# Altium PCB PCB_DUVBot_v0.00.PcbDoc (part 1 of 2)
Units mm, origin at the board's own origin, x right, y up, seen from the top; angles counter-clockwise.
Board outline 279.5 x 67.5 mm, 2 copper layers (Top Layer, Bottom Layer), stack 1.671 mm thick; 224 components, 141 nets, 694 pads, 218 vias.
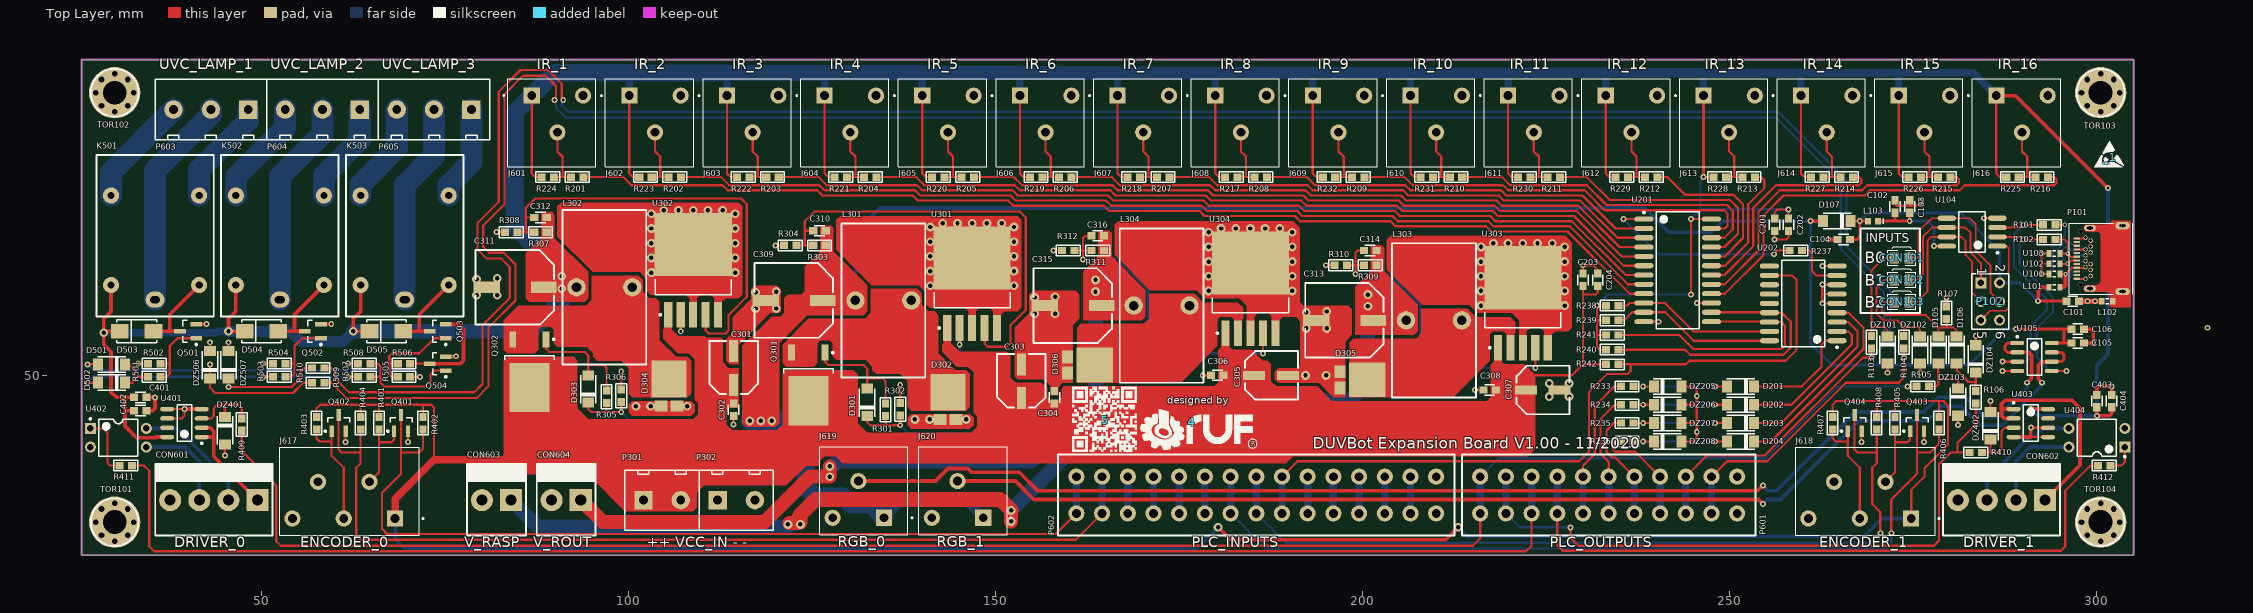
[diagram p0: Top Layer view]
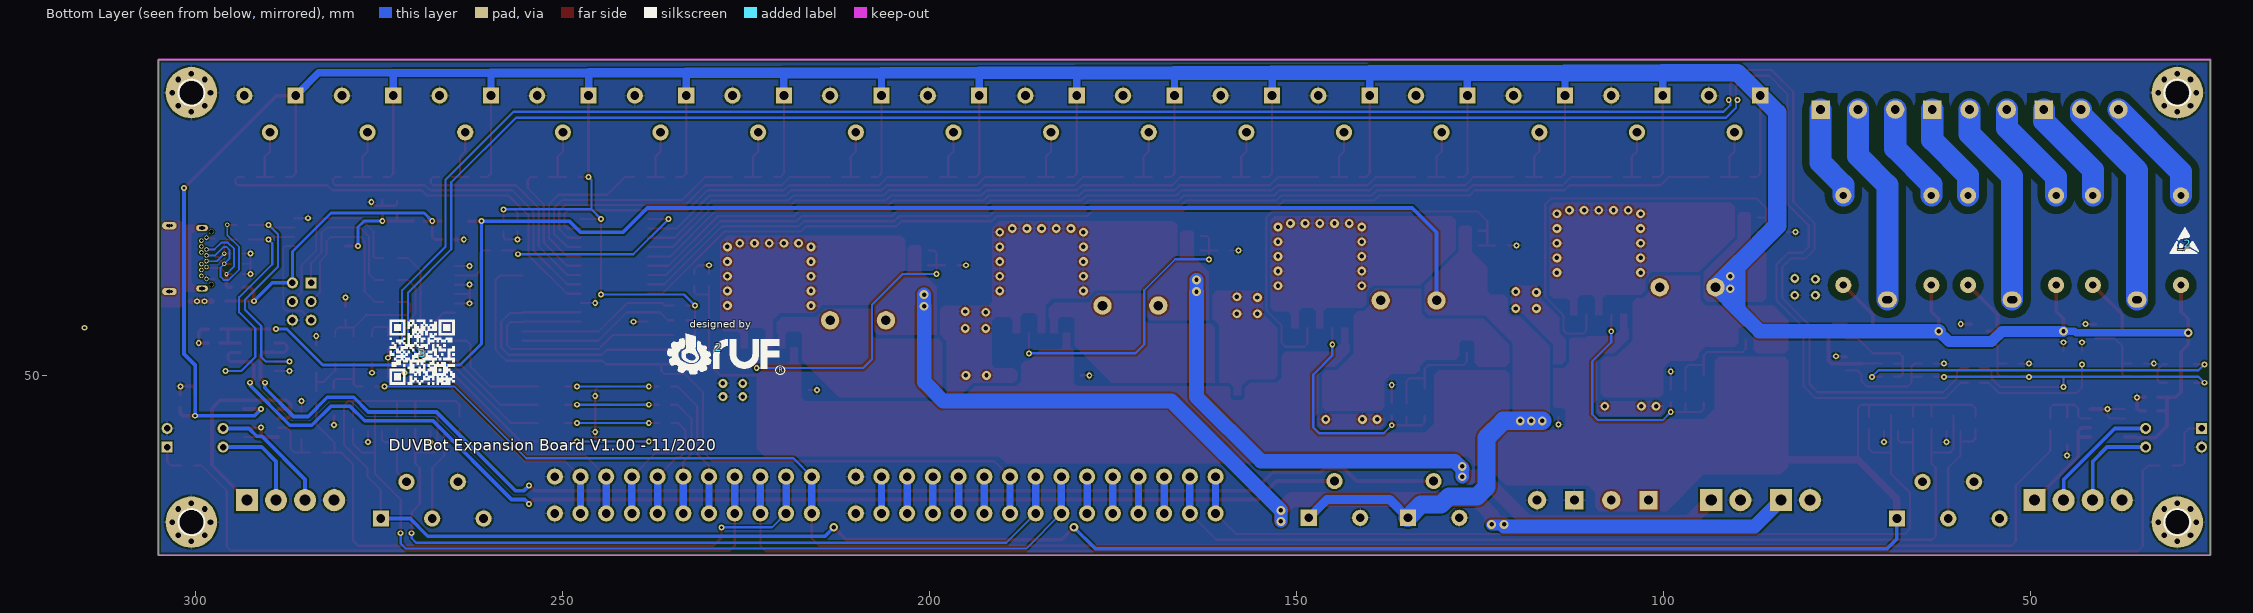
[diagram p1: Bottom Layer view, seen from below]
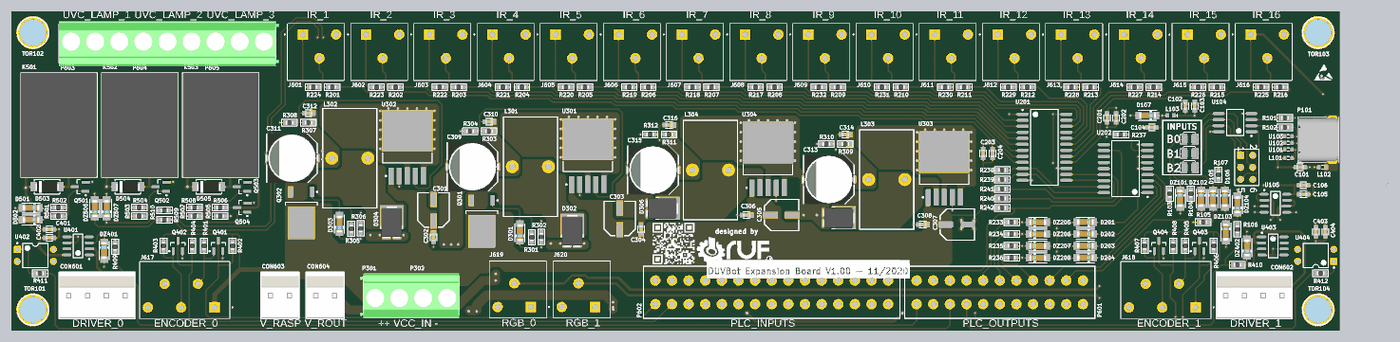
[diagram p3: 3D render of the assembled board from above, using the file's embedded part models]

## Layer stack, top to bottom
Top Layer: signal copper 0.0356
Dielectric: core 1.6, FR-4, Dk 4.8
Bottom Layer: signal copper 0.0356

## Board outline
305,93 25.5,93 25.5,25.5 305,25.5 305,93

## Design rules (kind name [scope] priority, off if disabled: settings)
Clearance Clearance_PowerAC [WithinRoom('Room_PowerAC')] p1: gap=1
Clearance Clearance_USB [WithinRoom('Room_USB')] p2: gap=0.2
Clearance [All] p3: gap=0.254
ComponentClearance [All] p1: gap=0 collisioncheckmode=3 verticalgap=0 showdistances=FALSE
PlaneClearance PlaneClearance_USB [WithinRoom('Room_USB')] p1: clearance=0.4
PlaneClearance PlaneClearance_PowerAC [WithinRoom('Room_PowerAC')] p2: clearance=1.5
PlaneClearance [All] p3: clearance=0.508
PlaneConnect PlaneConnect_PowerAC [WithinRoom('Room_PowerAC')] p1: planeconnectstyle=Relief reliefexpansion=0.508 reliefentries=4 reliefconductorwidth=0.5 reliefairgap=0.5
PlaneConnect PlaneConnect_USB [WithinRoom('Room_USB')] p2: planeconnectstyle=Relief reliefexpansion=0.2 reliefentries=4 reliefconductorwidth=0.254 reliefairgap=0.2
PlaneConnect [All] p3: planeconnectstyle=Relief reliefexpansion=0.508 reliefentries=4 reliefconductorwidth=0.254 reliefairgap=0.254
PolygonConnect [All] p1: connectstyle=Relief reliefconductorwidth=0.254 reliefentries=4 polygonreliefangle="90 Angle"
RoomDefinition Room_USB [InComponentClass('Components Class 3')] p1: confinementstyle=ConfineIn formatcopy=TRUE lockcomponents=FALSE outline 289.3,74.2 305.969,74.2 305.969,57.6 289.3,57.6
RoomDefinition Room_PowerAC [InComponentClass('Components Class 1')] p2: confinementstyle=ConfineIn formatcopy=TRUE lockcomponents=FALSE outline 34,93 34,87 26.5,79.5 26.5,57.5 78.5,57.5 78.5,74 81.5,77 81.5,93
RoutingVias [All] p1: holewidth=0.711 width=1.27 viastyle="Through Hole" minholewidth=0.711 minwidth=1.27 maxholewidth=0.711 maxwidth=1.27
SilkscreenOverComponentPads [All] p1: minsilkscreentomaskgap=0.254
SolderMaskExpansion [All] p1: expansion=0.102
Width Width_USB [WithinRoom('Room_USB')] p1: maxlimit=1 minlimit=0.2 preferedwidth=0.2
Width [All] p2: maxlimit=3 minlimit=0.254 preferedwidth=0.254
24 further rules are at their usual default settings.

## Classes and differential pairs
component class Circuit: TOR101 TOR102 TOR103 TOR104
net class SENS_IR_[0..15]: SENS_IR_0 SENS_IR_1 SENS_IR_2 SENS_IR_3 SENS_IR_4 SENS_IR_5 SENS_IR_6 SENS_IR_7 SENS_IR_8 SENS_IR_9 SENS_IR_10 SENS_IR_11 SENS_IR_12 SENS_IR_13 SENS_IR_14 SENS_IR_15
net class PLC_Q[0..9]: PLC_Q0 PLC_Q1 PLC_Q2 PLC_Q3 PLC_Q4 PLC_Q5 PLC_Q6 PLC_Q7 PLC_Q8 PLC_Q9
net class PLC_I[0..13]: PLC_I0 PLC_I1 PLC_I2 PLC_I3 PLC_I4 PLC_I5 PLC_I6 PLC_I7 PLC_I8 PLC_I9 PLC_I10 PLC_I11 PLC_I12 PLC_I13
component class "UVC Lamps Controller": D501 D502 D503 D504 D505 DZ506 DZ507 K501 K502 K503 Q501 Q502 Q503 Q504 R501 R502 R503 R504 R505 R506 R507 R508 R509 R510
component class "Sensor Multiplexation": C201 C202 C203 C204 D201 D202 D203 D204 DZ205 DZ206 DZ207 DZ208 R201 R202 R203 R204 R205 R206 R207 R208 R209 R210 R211 R212 R213 R214 R215 R216 R217 R218 R219 R220 R221 R222 R223 R224 R225 R226 R227 R228 R229 R230 R231 R232 R233 R234 R235 R236 R237 R238 R239 R240 R241 R242 U201 U202
component class "Power Supply": C301 C302 C303 C304 C305 C306 C307 C308 C309 C310 C311 C312 C313 C314 C315 C316 D301 D302 D303 D304 D305 D306 L301 L302 L303 L304 P301 P302 Q301 Q302 R301 R302 R303 R304 R305 R306 R307 R308 R309 R310 R311 R312 U301 U302 U303 U304
component class "Motor Signal and Encoders": C401 C402 C403 C404 DZ401 DZ402 Q401 Q402 Q403 Q404 R401 R402 R403 R404 R405 R406 R407 R408 R409 R410 R411 R412 U401 U402 U403 U404
component class "Indicator LEDs": C101 C102 C103 C104 C105 C106 CON101 CON102 CON103 D105 D106 D107 DZ101 DZ102 DZ103 DZ104 L101 L102 L103 P101 P102 R101 R102 R103 R104 R105 R106 R107 U101 U102 U103 U104 U105
component class "Connectors ans Interfaces": CON601 CON602 CON603 CON604 J601 J602 J603 J604 J605 J606 J607 J608 J609 J610 J611 J612 J613 J614 J615 J616 J617 J618 J619 J620 P601 P602 P603 P604 P605

## Components (designator, comment, footprint, x,y, rotation, side; value= is the part's Value field where it differs from the comment)
2 "" PCBComponent_1 228.7,53.8 r180 bottom
3 "" QR_webRUF_Large 269,53 r180 bottom
4 "" PCBComponent_1 176.705,43.6 r0 top
5 "" QR_webRUF_Large 164.9,43.9 r0 top
_1 "" ESD_Warning 301.8,79.7 r0 top
_2 "" ESD_Warning 28.9,67.9 r180 bottom
C101 "Cap Ceramico SMD" C0603 296.7,60.1 r0 top
C102 "Cap Ceramico SMD" C0603 272.5,73 r90 top
C103 "Cap Ceramico SMD" C0603 274.5,73 r270 top
C104 "Cap Ceramico SMD" C0603 265.5,68.5 r180 top
C105 "Cap Ceramico SMD" C0603 297.4,54.4 r0 top
C106 "Cap Ceramico SMD" C0603 297.4,56.3 r0 top
C201 "Cap Ceramico SMD" C0603 256.1,70.5 r270 top
C202 "Cap Ceramico SMD" C0603 258,70.5 r270 top
C203 "Cap Ceramico SMD" C0603 230,63 r90 top
C204 "Cap Ceramico SMD" C0603 232,63 r90 top
C301 "Cap Pol3" F55 114.3,51 r270 top
C302 "Cap Ceramico SMD" C0603 114.3,45.3 r270 top
C303 "Cap Pol3" F55 153.5,49.2 r270 top
C304 "Cap Ceramico SMD" C0603 158,47 r90 top
C305 "Cap Pol3" F55 187.5,50 r180 top
C306 "Cap Ceramico SMD" C0603 180.2,50 r180 top
C307 "Cap Pol3" F55 224.5,48 r180 top
C308 "Cap Ceramico SMD" C0603 217.3,48 r180 top
C309 "Cap Pol3" MCL1GS 122.5,60.2 r0 top
C310 "Cap Ceramico SMD" C0603 126,69.7 r180 top
C311 "Cap Pol3" MCL1GS 84.5,62 r0 top
C312 "Cap Ceramico SMD" C0603 88,71.5 r180 top
C313 "Cap Pol3" MCL1GS 197.5,57.5 r0 top
C314 "Cap Ceramico SMD" C0603 201,67 r180 top
C315 "Cap Pol3" MCL1GS 160.5,59.5 r0 top
C316 "Cap Ceramico SMD" C0603 163.9,69 r180 top
C401 "Cap Ceramico SMD" C0603 33.5,47 r0 top
C402 "Cap Ceramico SMD" C0603 33.5,45.2 r0 top
C403 "Cap Ceramico SMD" C0603 300,46.5 r90 top
C404 "Cap Ceramico SMD" C0603 302,46.5 r90 top
CON101 "Puente" "PUENTE 0805" 273.4,66 r0 top
CON102 "Puente" "PUENTE 0805" 273.4,63 r0 top
CON103 "Puente" "PUENTE 0805" 273.4,60 r0 top
CON601 "Header PW4 - Recto" "PW4 - Recto" 43.5,33 r0 top locked
CON602 "Header PW4 - Recto" "PW4 - Recto" 287,33 r0 top locked
CON603 "Header PW2 - Recto" "PW2 - Recto" 82,33 r0 top locked
CON604 "Header PW2 - Recto" "PW2 - Recto" 91.5,33 r0 top locked
D105 "Diodo Rectificador SMD" SOD-80 278.4,51.6 r90 top
D106 "Diodo Rectificador SMD" SOD-80 280.9,51.6 r90 top
D107 "Diodo Rectificador SMD" SOD-80 262.7,71 r0 top
D201 "Diodo Rectificador SMD" SOD-80 249.6,48.5 r0 top
D202 "Diodo Rectificador SMD" SOD-80 249.6,46 r0 top
D203 "Diodo Rectificador SMD" SOD-80 249.6,43.5 r0 top
D204 "Diodo Rectificador SMD" SOD-80 249.6,41 r0 top
D301 "Diodo Rectificador SMD" SOD-80 132.5,48.2 r270 top
D302 "Diodo Rectificador SMD" TO-277-3 143.5,47.7 r270 top
D303 "Diodo Rectificador SMD" SOD-80 94.5,50 r270 top
D304 "Diodo Rectificador SMD" TO-277-3 105.5,49.5 r270 top
D305 "Diodo Rectificador SMD" TO-277-3 200.6,49.4 r180 top
D306 "Diodo Rectificador SMD" TO-277-3 163.5,51.4 r180 top
D501 "Diodo Rectificador SMD" SOD-80 27.7,51.5 r0 top
D502 "Diodo Rectificador SMD" SOD-80 27.7,49 r0 top
D503 "Diodo Rectificador SMD" DO-214 33,56 r180 top
D504 "Diodo Rectificador SMD" DO-214 50,56 r180 top
D505 "Diodo Rectificador SMD" DO-214 67,56 r180 top
DZ101 "Diodo Zenner SMD" SOD-80 271.5,51.6 r90 top
DZ102 "Diodo Zenner SMD" SOD-80 275.9,51.6 r90 top
DZ103 "Diodo Zenner SMD" SOD-80 281.1,44.5 r90 top
DZ104 "Diodo Zenner SMD" SOD-80 283.5,54.1 r270 top
DZ205 "Diodo Zenner SMD" SOD-80 243.4,48.5 r180 top
DZ206 "Diodo Zenner SMD" SOD-80 243.4,46 r180 top
DZ207 "Diodo Zenner SMD" SOD-80 243.4,43.5 r180 top
DZ208 "Diodo Zenner SMD" SOD-80 243.4,41 r180 top
DZ401 "Diodo Zenner SMD" SOD-80 45,40.6 r90 top
DZ402 "Diodo Zenner SMD" SOD-80 285.5,45 r270 top
DZ506 "Diodo Zenner SMD" SOD-80 43,53.3 r270 top
DZ507 "Diodo Zenner SMD" SOD-80 45.5,53.3 r270 top
J601 "TBL002A-350-03GR-2OR" CUI_TBL002A-350-03GR-2OR 86.8,88.1 r0 top locked
J602 "TBL002A-350-03GR-2OR" CUI_TBL002A-350-03GR-2OR 100.1,88.1 r0 top locked
J603 "TBL002A-350-03GR-2OR" CUI_TBL002A-350-03GR-2OR 113.4,88.1 r0 top locked
J604 "TBL002A-350-03GR-2OR" CUI_TBL002A-350-03GR-2OR 126.7,88.1 r0 top locked
J605 "TBL002A-350-03GR-2OR" CUI_TBL002A-350-03GR-2OR 140,88.1 r0 top locked
J606 "TBL002A-350-03GR-2OR" CUI_TBL002A-350-03GR-2OR 153.3,88.1 r0 top locked
J607 "TBL002A-350-03GR-2OR" CUI_TBL002A-350-03GR-2OR 166.6,88.1 r0 top locked
J608 "TBL002A-350-03GR-2OR" CUI_TBL002A-350-03GR-2OR 179.9,88.1 r0 top locked
J609 "TBL002A-350-03GR-2OR" CUI_TBL002A-350-03GR-2OR 193.2,88.1 r0 top locked
J610 "TBL002A-350-03GR-2OR" CUI_TBL002A-350-03GR-2OR 206.5,88.1 r0 top locked
J611 "TBL002A-350-03GR-2OR" CUI_TBL002A-350-03GR-2OR 219.8,88.1 r0 top locked
J612 "TBL002A-350-03GR-2OR" CUI_TBL002A-350-03GR-2OR 233.1,88.1 r0 top locked
J613 "TBL002A-350-03GR-2OR" CUI_TBL002A-350-03GR-2OR 246.4,88.1 r0 top locked
J614 "TBL002A-350-03GR-2OR" CUI_TBL002A-350-03GR-2OR 259.7,88.1 r0 top locked
J615 "TBL002A-350-03GR-2OR" CUI_TBL002A-350-03GR-2OR 273,88.1 r0 top locked
J616 "TBL002A-350-03GR-2OR" CUI_TBL002A-350-03GR-2OR 286.3,88.1 r0 top locked
J617 "TBL002A-350-05GR-2OR" CUI_TBL002A-350-05GR-2OR 68.2,30.5 r180 top locked
J618 "TBL002A-350-05GR-2OR" CUI_TBL002A-350-05GR-2OR 274.7,30.5 r180 top locked
J619 "TBL002A-350-03GR-2OR" CUI_TBL002A-350-03GR-2OR 134.8,30.6 r180 top locked
J620 "TBL002A-350-03GR-2OR" CUI_TBL002A-350-03GR-2OR 148.3,30.6 r180 top locked
K501 "Relay-SPDT" JS1-5V-F 41.5,62.3 r90 top
K502 "Relay-SPDT" JS1-5V-F 58.5,62.3 r90 top
K503 "Relay-SPDT" JS1-5V-F 75.5,62.3 r90 top
L101 "Inductor" J1-0603 294.2,62 r180 top
L102 "Inductor" J1-0603 301.4,60.1 r0 top
L103 "Inductor" INDC1608L 269.5,71 r180 top
L301 "Inductor" KM-3.0 138.5,60.2 r270 top
L302 "Inductor" KM-3.0 100.5,62 r270 top
L303 "Inductor" KM-3.0 213.5,57.5 r270 top
L304 "Inductor" KM-3.0 176.4,59.5 r270 top
P101 "USB_TYPE_C" USB_TYPE_C 297.8,65.9 r90 top
P102 "Header 3X2" HDR2X3 284.2,62.6 r270 top
P301 "POWER" Terminal_2way_508 107.1,33 r270 top locked
P302 "POWER" Terminal_2way_508 117.2,33 r270 top locked
P601 "PLC OUTPUTS" SPTAF_1/15-3.5-EL_11POS 216,31.2 r0 top locked
P602 "PLC INPUTS" SPTAF_1/15-3.5-EL_15POS 161,31.2 r0 top locked
P603 "UVC_LAMP1" Terminal_3way_508 43.1,86.2 r90 top locked
P604 "UVC_LAMP2" Terminal_3way_508 58.3,86.2 r90 top locked
P605 "UVC_LAMP3" Terminal_3way_508 73.5,86.2 r90 top locked
Q301 "TSM35N10" TO-252AA_A_M 124.5,48.7 r270 top
Q302 "TSM35N10" TO-252AA_A_M 86.5,50.5 r270 top
Q401 "BC817-40" SOT23_M 69,43.5 r90 top
Q402 "BC817-40" SOT23_M 60.5,43.5 r90 top
Q403 "BC817-40" SOT23_M 275.5,43.5 r90 top
Q404 "BC817-40" SOT23_M 267,43.5 r90 top
Q501 "BC817-40" SOT23_M 40,56 r180 top
Q502 "BC817-40" SOT23_M 57,56 r180 top
Q503 "BC817-40" SOT23_M 74,56 r180 top
Q504 "BC817-40" SOT23_M 74,51.6 r180 top
R101 "Res SMD" R0603 293.5,70.5 r0 top
R102 "Res SMD" R0603 293.5,68.5 r0 top
R103 "Res SMD" R0603 269.3,54.5 r90 top
R104 "Res SMD" R0603 273.7,54.5 r90 top
R105 "Res SMD" R0603 276.3,48.5 r0 top
R106 "Res SMD" R0603 283.5,47 r90 top
R107 "Res SMD" R0603 279.5,58.5 r90 top
R201 "Res SMD" R0603 93,77 r0 top
R202 "Res SMD" R0603 106.3,77 r0 top
R203 "Res SMD" R0603 119.6,77 r0 top
R204 "Res SMD" R0603 132.9,77 r0 top
R205 "Res SMD" R0603 146.2,77 r0 top
R206 "Res SMD" R0603 159.5,77 r0 top
R207 "Res SMD" R0603 172.8,77 r0 top
R208 "Res SMD" R0603 186.1,77 r0 top
R209 "Res SMD" R0603 199.4,77 r0 top
R210 "Res SMD" R0603 212.7,77 r0 top
R211 "Res SMD" R0603 226,77 r0 top
R212 "Res SMD" R0603 239.3,77 r0 top
R213 "Res SMD" R0603 252.6,77 r0 top
R214 "Res SMD" R0603 265.9,77 r0 top
R215 "Res SMD" R0603 279.2,77 r0 top
R216 "Res SMD" R0603 292.5,77 r0 top
R217 "Res SMD" R0603 182.1,77 r0 top
R218 "Res SMD" R0603 168.8,77 r0 top
R219 "Res SMD" R0603 155.5,77 r0 top
R220 "Res SMD" R0603 142.2,77 r0 top
R221 "Res SMD" R0603 128.9,77 r0 top
R222 "Res SMD" R0603 115.6,77 r0 top
R223 "Res SMD" R0603 102.3,77 r0 top
R224 "Res SMD" R0603 89,77 r0 top
R225 "Res SMD" R0603 288.5,77 r0 top
R226 "Res SMD" R0603 275.2,77 r0 top
R227 "Res SMD" R0603 261.9,77 r0 top
R228 "Res SMD" R0603 248.6,77 r0 top
R229 "Res SMD" R0603 235.3,77 r0 top
R230 "Res SMD" R0603 222,77 r0 top
R231 "Res SMD" R0603 208.7,77 r0 top
R232 "Res SMD" R0603 195.4,77 r0 top
R233 "Res SMD" R0603 236,48.5 r0 top
R234 "Res SMD" R0603 236,46 r0 top
R235 "Res SMD" R0603 236,43.5 r0 top
R236 "Res SMD" R0603 236,41 r0 top
R237 "Res SMD" R0603 259,67 r0 top
R238 "Res SMD" R0603 234,59.5 r180 top
R239 "Res SMD" R0603 234,57.5 r180 top
R240 "Res SMD" R0603 234,53.5 r180 top
R241 "Res SMD" R0603 234,55.5 r180 top
R242 "Res SMD" R0603 234,51.5 r180 top
R301 "Res SMD" R0603 135,45.3 r270 top
R302 "Res SMD" R0603 137,45.4 r90 top
R303 "Res SMD" R0603 126,67.7 r180 top
R304 "Res SMD" R0603 122,67.7 r180 top
R305 "Res SMD" R0603 97,47.1 r270 top
R306 "Res SMD" R0603 99,47.2 r90 top
R307 "Res SMD" R0603 88,69.5 r180 top
R308 "Res SMD" R0603 84,69.5 r180 top
R309 "Res SMD" R0603 201,65 r180 top
R310 "Res SMD" R0603 197,65 r180 top
R311 "Res SMD" R0603 163.9,67 r180 top
R312 "Res SMD" R0603 159.9,67 r180 top
R401 "Res SMD" R0603 66,43.5 r270 top
R402 "Res SMD" R0603 72,43.5 r270 top
R403 "Res SMD" R0603 57.5,43.5 r270 top
R404 "Res SMD" R0603 63.5,43.5 r270 top
R405 "Res SMD" R0603 272.5,43.5 r270 top
R406 "Res SMD" R0603 278.5,43.5 r270 top
R407 "Res SMD" R0603 264,43.5 r270 top
R408 "Res SMD" R0603 270,43.5 r270 top
R409 "Res SMD" R0603 47.3,43.3 r90 top
R410 "Res SMD" R0603 283.5,39.5 r0 top
R411 "Res SMD" R0603 31.5,37.7 r0 top
R412 "Res SMD" R0603 301,37.7 r180 top
R501 "Res SMD" R0603 35.4,49.8 r180 top
R502 "Res SMD" R0603 35.4,51.6 r180 top
R503 "Res SMD" R0603 52.4,49.8 r180 top
R504 "Res SMD" R0603 52.4,51.6 r180 top
R505 "Res SMD" R0603 69.4,49.8 r0 top
R506 "Res SMD" R0603 69.4,51.6 r0 top
R507 "Res SMD" R0603 64,49.8 r180 top
R508 "Res SMD" R0603 64,51.6 r180 top
R509 "Res SMD" R0603 57.7,49 r180 top
R510 "Res SMD" R0603 57.7,51 r180 top
TOR101 "SUJETADOR" TOR_ALEM_M3 30,30 r0 top locked
TOR102 "SUJETADOR" TOR_ALEM_M3 30,88.5 r0 top locked
TOR103 "SUJETADOR" TOR_ALEM_M3 300.5,88.5 r0 top locked
TOR104 "SUJETADOR" TOR_ALEM_M3 300.5,30 r0 top locked
U101 "DIODE TVS BIDIR" J1-0603 294.2,63.8 r180 top
U102 "DIODE TVS BIDIR" J1-0603 294.2,65.2 r180 top
U103 "DIODE TVS BIDIR" J1-0603 294.2,66.6 r180 top
U104 "ATtiny85-20SU" 8S2_M 283,69.5 r180 top
U105 "TL082D" D008_L 291.5,52.5 r0 top
U201 "HCF4067BM1" SO24_M 242.9,64.3 r0 top
U202 "ULN2803LW" LW18_M 260,59.8 r180 top
U301 "LM2596S-ADJ" TS5B_M 146.8,62.5 r90 top
U302 "LM2596S-ADJ" TS5B_M 108.8,64.3 r90 top
U303 "LM2596S-ADJ" TS5B_M 221.8,59.8 r90 top
U304 "LM2596S-ADJ" TS5B_M 184.7,61.8 r90 top
U401 "TL082D" D008_L 39.5,43.5 r180 top
U402 "TPC817" DIP-4 30.5,41.5 r0 top
U403 "TL082D" D008_L 291,43.5 r0 top
U404 "TPC817" DIP-4 300,41.5 r180 top

## Footprints (in the part's own frame and the unit in brackets; to place one, negate y for a bottom-side part, rotate by r counter-clockwise, add the part's x,y. Pads: shape width x height; smd on the part's side, far side on the other; paste and mask are expansions set on the pad)
8S2_M [mm] "SOP, 8-Leads, Body 5.3x5.3mm, Pitch 1.27mm, IPC Low Density"
  oval 2.5x0.7 smd: 1(-3.45,1.905) 2(-3.45,0.635) 3(-3.45,-0.635) 4(-3.45,-1.905) 5(3.45,-1.905) 6(3.45,-0.635) 7(3.45,0.635) 8(3.45,1.905)
  silkscreen extent -3.57,-2.75 1.8,2.93, body extent -2.73,-2.75 2.73,2.75, height 2.16
C0603 [mm] "Chip Capacitor; Body 1.6 x 0.8 mm (LxW typ)"
  rect 1.1x1 smd: 1(-0.85,0) 2(0.85,0)
  silkscreen extent -0.7,-0.7 0.7,0.7, body extent -0.8,-0.4 0.8,0.4, height 0.82
CUI_TBL002A-350-03GR-2OR [mm]
  rect 2.2x2.2 hole 1.2: 1(0,0)
  round 2.2 hole 1.2: 2(3.5,-5) 3(7,0)
  silkscreen extent -3.9,-9.7 8.75,2.3
CUI_TBL002A-350-05GR-2OR [mm]
  rect 2.2x2.2 hole 1.2: 1(0,0)
  round 2.2 hole 1.2: 2(3.5,-5) 3(7,0) 4(10.5,-5) 5(14,0)
  silkscreen extent -3.9,-9.7 15.75,2.3
D008_L [mm] "SOIC, 8-Leads, Body 4.9x3.9mm, Pitch 1.27mm, IPC High Density"
  oval 1.9x0.6 smd: 1(-2.35,1.905) 2(-2.35,0.635) 3(-2.35,-0.635) 4(-2.35,-1.905) 5(2.35,-1.905) 6(2.35,-0.635) 7(2.35,0.635) 8(2.35,1.905)
  silkscreen extent -2.47,-2.5 1,2.88, body extent -2,-2.5 2,2.5, height 1.75
DIP-4 [mm] "DIP; 4 Leads; Row Spacing 7.62 mm; Pitch 2.54 mm"
  rect 1.5x1.5 hole 0.9: 1(-3.81,1.27)
  round 1.5 hole 0.9: 2(-3.81,-1.27) 3(3.81,-1.27) 4(3.81,1.27)
  silkscreen extent -3.93,-2.55 2.65,2.69, body extent -3.15,-2.5 3.15,2.5, height 5.6
DO-214 [mm] "Encapsulado SAM/DO-214 para diodo ES1A-J"
  rect 2.4x2 smd: 1(-2.286,0) 2(2.286,0)
  silkscreen extent -2.7,-1.55 2.7,1.55, body extent -2.5,-1.35 2.5,1.35, height 2.2
ESD_Warning [mm] "ESD Susceptibility Symbol Warning"
  silkscreen extent -2.13,-1.32 1.83,2.18
F55 [mm]
  rect 3x1.2 smd: 1(2.286,0) 2(-2.286,0)
  silkscreen extent -3.68,-3.3 3.56,3.3
HDR2X3 [mm] "Connector; Header; 3x2 Position"
  rect 1.5x1.5 hole 0.9: 1(0,0)
  round 1.5 hole 0.9: 2(0,2.54) 3(2.54,0) 4(2.54,2.54) 5(5.08,0) 6(5.08,2.54)
  silkscreen extent -1.27,-1.27 6.35,3.81
INDC1608L [mm] "Chip Inductor, Body 1.6x0.8mm, IPC High Density"
  rect 0.8x0.9 smd: 1(-0.7,0) 2(0.7,0)
  silkscreen extent -1.4,-0.35 -1.4,0.35, body extent -0.87,-0.48 0.87,0.48, height 0.55
J1-0603 [mm] "Chip Resistor, Body 1.6x0.8mm, IPC High Density"
  rect 0.7x0.9 smd: 1(-0.75,0) 2(0.75,0)
  silkscreen extent -0.2,-0.35 0.2,0.35, body extent -0.85,-0.48 0.85,0.48, height 0.9
JS1-5V-F [mm] "RELAY GEN PURPOSE SPDT 10A 5V"
  round 2.2 hole 1: 1(-2,5.8) 1(-2,6) 1(-2,6.2) 2(12.2,12) 3(12.2,0) 4(0,12) 5(0,0)
  silkscreen extent -4.3,-2 17.7,14, body extent -4.3,-2 17.7,14, height 16
KM-3.0 [mm] "FIXED IND 3A 80 MOHM TH"
  round 2.5 hole 1.3: 1(0,0) 2(0,-7.6)
  silkscreen extent -10.5,-9.5 10.5,1.9
LW18_M [mm] "SOIC, 18-Leads, Body 11.6x7.5mm, Pitch 1.27mm, IPC Low Density"
  oval 2.6x0.7 smd: 1(-4.6,5.08) 2(-4.6,3.81) 3(-4.6,2.54) 4(-4.6,1.27) 5(-4.6,0) 6(-4.6,-1.27) 7(-4.6,-2.54) 8(-4.6,-3.81) 9(-4.6,-5.08) 10(4.6,-5.08) 11(4.6,-3.81) 12(4.6,-2.54) 13(4.6,-1.27) 14(4.6,0) 15(4.6,1.27) 16(4.6,2.54) 17(4.6,3.81) 18(4.6,5.08)
  silkscreen extent -4.72,-5.9 2.9,6.1, body extent -3.8,-5.95 3.8,5.95, height 2.65
MCL1GS [mm]
  rect 3.5x1.5 smd: 1(3.937,0)
  rect 3.6x1.5 smd: 2(-3.81,0)
  silkscreen extent -5.33,-5.08 5.33,5.08, body extent -5.5,-5.2 5.5,5.2, height 10.41
PCBComponent_1 [mm]
  silkscreen extent -6.98,-3.68 8.28,1.8
"PUENTE 0805" [mil]
  rect 50x60 smd: 1(-40,0) 2(40,0)
  silkscreen extent -75,-40 75,59
"PW2 - Recto" [mm]
  rect 3x3 hole 1.5: 1(1.981,0)
  round 3 hole 1.5: 2(-1.981,0)
  silkscreen extent -4.07,-4.83 4.01,4.98, body extent -3.96,-4.62 3.96,4.98, height 13.95
"PW4 - Recto" [mm]
  rect 3x3 hole 1.5: 1(5.944,0)
  round 3 hole 1.5: 2(1.981,0) 3(-1.981,0) 4(-5.944,0)
  silkscreen extent -7.98,-4.83 7.98,4.98, body extent -7.95,-4.6 7.89,5, height 13.95
QR_webRUF_Large [mm] "QR Code Web Page RUF Large"
  silkscreen extent -4.5,-4.27 4.34,4.52
R0603 [mm] "Chip Capacitor; Body 1.6 x 0.8 mm (LxW typ)"
  rect 1.1x1 smd: 1(-0.85,0) 2(0.85,0)
  silkscreen extent -1.63,-0.72 1.63,0.72, body extent -0.8,-0.4 0.8,0.4, height 0.5
SO24_M [mm] "SOIC, 24-Leads, Body 15.4x7.5mm, Pitch 1.27mm, IPC Low Density"
  oval 2.6x0.7 smd: 1(-4.6,6.985) 2(-4.6,5.715) 3(-4.6,4.445) 4(-4.6,3.175) 5(-4.6,1.905) 6(-4.6,0.635) 7(-4.6,-0.635) 8(-4.6,-1.905) 9(-4.6,-3.175) 10(-4.6,-4.445) 11(-4.6,-5.715) 12(-4.6,-6.985) 13(4.6,-6.985) 14(4.6,-5.715) 15(4.6,-4.445) 16(4.6,-3.175) 17(4.6,-1.905) 18(4.6,-0.635) 19(4.6,0.635) 20(4.6,1.905) 21(4.6,3.175) 22(4.6,4.445) 23(4.6,5.715) 24(4.6,6.985)
  silkscreen extent -4.72,-7.95 2.9,8.01, body extent -3.8,-7.8 3.8,7.8, height 2.65
SOD-80 [mm]
  rect 1.37x1.62 smd: 1(0,0) 2(3.71,0)
  silkscreen extent 0,-1.05 3.81,1.05, body extent 0.1,-0.71 3.7,0.79, height 1.5
SOT23_M [mm] "SOT23, 3-Leads, Body 2.9x1.3mm, Pitch 0.95mm, Lead Span 2.3mm, IPC Low Density"
  rect 1.6x0.6 smd: 1(-1.1,0.95) 2(-1.1,-0.95) 3(1.1,0)
  silkscreen extent -1.22,-1.5 0.7,1.92, body extent -0.7,-1.5 0.7,1.5, height 1.1
SPTAF_1/15-3.5-EL_11POS [mm] "PCB terminal block - SPTAF 1/15-3,5-EL"
  round 2.2 hole 1.2: 1(0,0) 1(0,5) 2(3.5,0) 2(3.5,5) 3(7,0) 3(7,5) 4(10.5,0) 4(10.5,5) 5(14,0) 5(14,5) 6(17.5,0) 6(17.5,5) 7(21,0) 7(21,5) 8(24.5,0) 8(24.5,5) 9(28,0) 9(28,5) 10(31.5,0) 10(31.5,5) 11(35,0) 11(35,5)
  silkscreen extent -2.5,-3 37.5,8
SPTAF_1/15-3.5-EL_15POS [mm] "PCB terminal block - SPTAF 1/15-3,5-EL"
  round 2.2 hole 1.2: 1(0,0) 1(0,5) 2(3.5,0) 2(3.5,5) 3(7,0) 3(7,5) 4(10.5,0) 4(10.5,5) 5(14,0) 5(14,5) 6(17.5,0) 6(17.5,5) 7(21,0) 7(21,5) 8(24.5,0) 8(24.5,5) 9(28,0) 9(28,5) 10(31.5,0) 10(31.5,5) 11(35,0) 11(35,5) 12(38.5,0) 12(38.5,5) 13(42,0) 13(42,5) 14(45.5,0) 14(45.5,5) 15(49,0) 15(49,5)
  silkscreen extent -2.5,-3 51.5,8
Terminal_2way_508 [mm] "TERMINAL BLOCK, SCREW TYPE, 5.08, 2WAY"
  rect 2.5x2.5 hole 1.2: 1(0,-5.08)
  round 2.5 hole 1.2: 2(0,0)
  silkscreen extent -4.1,-7.6 4.1,2.52, body extent -4.7,-8.17 4.8,2.56, height 15
Terminal_3way_508 [mm] "TERMINAL BLOCK, SCREW TYPE, 5.08, 3WAY"
  rect 2.5x2.5 hole 1.2: 1(0,-5.08)
  round 2.5 hole 1.2: 2(0,0) 3(0,5.08)
  silkscreen extent -4.1,-7.6 4.1,7.6, body extent -4.8,-8.21 4.7,7.6, height 15.5
TO-252AA_A_M [mm] "D-PAK, 4-Leads, Body 6.1x6.6mm, Pitch 2.28mm, Lead Span 9.8mm, IPC Low Density"
  rect 2.2x0.95 smd: 1(-4.4,2.28) 3(-4.4,-2.28)
  rect 6.7x5.5 smd: 4(2.15,0)
  silkscreen extent -4.52,-3.35 -1.6,3.43, body extent -2.2,-3.35 4,3.35, height 2.38
TO-277-3 [mm] "Diode Schottky 100V 20A Surface Mount TO-277-3"
  rect 1.5x1.75 smd: 1(3.7,-1.1) 1(3.7,1.1)
  rect 5x4.75 smd: 2(0,0)
  body extent -2.3,-2.37 4.35,2.38, height 1.2
TOR_ALEM_M3 [mm]
  round 7 hole 3.25: 1(0,0)
  silkscreen extent -3.25,-3.25 3.25,3.25, body extent -2.75,-2.75 2.75,2.75, height 3.15
TS5B_M [mm] "D2-PAK, 6-Leads, Body 8.6x10.2mm, Pitch 1.7mm, Lead Span 14.1mm, IPC Low Density"
  rect 3.5x1.1 smd: 1(-6.05,3.4) 2(-6.05,1.7) 3(-6.05,0) 4(-6.05,-1.7) 5(-6.05,-3.4)
  rect 8.6x10.5 smd: 6(3.5,0)
  silkscreen extent -6.17,-5.2 -1.2,5.2, body extent -3.3,-5.2 6.1,5.2, height 4.65
USB_TYPE_C [mm] "CONN RCP USB3.1 TYPEC 24P SMD RA"
  rect 0.3x0.9 smd: A1(-2.75,0.56) A2(-2.25,0.56) A3(-1.75,0.56) A4(-1.25,0.56) A5(-0.75,0.56) A6(-0.25,0.56) A7(0.25,0.56) A8(0.75,0.56) A9(1.25,0.56) A10(1.75,0.56) A11(2.25,0.56) A12(2.75,0.56)
  round 0.6 hole 0.4: B1(2.85,-0.65) B2(2.45,-1.35) B3(1.65,-1.35) B4(1.25,-0.65) B5(0.85,-1.35) B6(0.45,-0.65) B7(-0.35,-0.65) B8(-0.75,-1.35) B9(-1.15,-0.65) B10(-1.55,-1.35) B11(-2.35,-1.35) B12(-2.75,-0.65) S1(-4.079,-1.499) S1(-4.079,-0.978) S2(4.181,-1.499) S2(4.181,-0.98) S3(-4.489,-5.949) S3(-4.488,-5.431) S4(4.491,-5.431) S4(4.491,-5.949)
  round 0.65 hole 0.65 unplated: None(-3.55,0) None(3.65,0)
  oval 0.8x1.6 hole 0.5: S1(-4.08,-1.25) S2(4.18,-1.25)
  oval 1x2 hole 0.5: S3(-4.49,-5.7) S4(4.49,-5.7)
  silkscreen extent -4.82,-7.05 4.82,1.55, body extent -4.78,-7.06 4.87,1.64, height 3.17

## Part data
C101 C102 C103 C104 C105 C106 C201 C202 C203 C204 C302 C304 C306 C308 C310 C312 C314 C316 C401 C402 C403 C404: "Cap Ceramico SMD 0805"
C301 C303 C305 C307 C309 C311 C313 C315: "Polarized Capacitor (Surface Mount)"
CON601 CON602 CON603 CON604: "Header PW - paso 0.156\""
D105 D106 D107 D201 D202 D203 D204 D301 D302 D303 D304 D305 D306 D501 D502 D503 D504 D505: "Diodo Rectificador"
DZ101 DZ102 DZ103 DZ104 DZ205 DZ206 DZ207 DZ208 DZ401 DZ402 DZ506 DZ507: "Diodo zenner SMD"
J601 J602 J603 J604 J605 J606 J607 J608 J609 J610 J611 J612 J613 J614 J615 J616 J617 J618 J619 J620: "1~24 Poles, Screwless, 45°, 3.50 Pitch, 24~20 (AWG), Terminal Block Connector"
K501 K502 K503: "Single-Pole Dual-Throw Relay"
P101: library part "USB Type C", "USB - C _Type - C_ USB 3.1 _USB 3.1 Gen 2, Superspeed+_ Receptacle Connector 24 Position Surface Mount, Right Angle; Through Hole"
P102: "Header, 3-Pin, Dual row"
P301 P302: library part "Header 2", "Header, 2-Pin"
P601: library part "Header 11", "Header, 11-Pin"
P602: library part "Header 15", "Header, 15-Pin"
P603 P604 P605: library part "Header 3", "Header, 3-Pin"
Q301 Q302: library part MOSFET-N, "N-Channel MOSFET"
Q401 Q402 Q403 Q404 Q501 Q502 Q503 Q504: "NPN General-purpose Transistor"
R101 R102 R103 R104 R105 R106 R107 R201 R202 R203 R204 R205 R206 R207 R208 R209 R210 R211 R212 R213 R214 R215 R216 R217 R218 R219 R220 R221 R222 R223 R224 R225 R226 R227 R228 R229 R230 R231 R232 R233 R234 R235 R236 R237 R238 R239 R240 R241 R242 R301 R302 R303 R304 R305 R306 R307 R308 R309 R310 R311 R312 R401 R402 R403 R404 R405 R406 R407 R408 R409 R410 R411 R412 R501 R502 R503 R504 R505 R506 R507 R508 R509 R510: "Res Smd"
TOR101 TOR102 TOR103 TOR104: library part "Tornillos Sujecion", "Agujero para tornillo ed sujecion ed placa"
U101 U102 U103: library part "DIODE TVS BIDIRECTIONAL"
U104: "Low Power tinyAVR® 8-Bit Microcontroller, 8K Flash Memory, 20MHz, Industrial Temperature, 8-Lead SOIC, Pb-Free"
U105 U401 U403: "JFET-Input Operational Amplifier"
U201: "Analog Multiplexer/Demultiplexer"
U202: "High-Voltage, High-Current Darlington Array"
U301 U302 U303 U304: "SIMPLE SWITCHER® Power Converter 150 KHz 3A Step-Down Voltage Regulator, 5-pin TO-263"
U402 U404: library part Optoisolator1, "4-Pin Phototransistor Optocoupler"

## Free pads (board coordinates)
  round 1.524 hole 0.762: 0(30,32.6) 0(30,91.1) 0(300.5,32.6) 0(300.5,91.1) 1(30,27.4) 1(30,85.9) 1(300.5,27.4) 1(300.5,85.9) 2(32.6,30) 2(32.6,88.5) 2(303.1,30) 2(303.1,88.5) 3(27.4,30) 3(27.4,88.5) 3(297.9,30) 3(297.9,88.5) 4(28.2,28.2) 4(28.2,86.7) 4(298.7,28.2) 4(298.7,86.7) 5(31.8,28.2) 5(31.8,86.7) 5(302.3,28.2) 5(302.3,86.7) 6(31.8,31.8) 6(31.8,90.3) 6(302.3,31.8) 6(302.3,90.3) 7(28.2,31.8) 7(28.2,90.3) 7(298.7,31.8) 7(298.7,90.3)

## Via types
v1: diameter 1.2, hole 0.6, Top Layer to Bottom Layer, tented both sides, 108 vias
v2: diameter 0.8, hole 0.4, Top Layer to Bottom Layer, tented both sides, 106 vias
v3: diameter 0.6, hole 0.3, Top Layer to Bottom Layer, tented both sides, 4 vias

## Nets (pads, with @x,y where several pads share a name; then routed paths per layer and width w, separated by ;. In a path a pad name is that pad's centre, name@x,y a point inside that pad or via, vN(x,y) a via of type N, cw(c..) or ccw(c..) an arc to the next point about the centre after c; other vN are vias at no path point)
10V_Q8: D501.1 DZ506.2 R505.2 R509.2 | length 67.5
  Top Layer w0.3: v2(26.3,51.5) D501.1@27.7,51.5 ; v2(43,51.5) DZ506.2@43,49.59 43,48.3 43.704,47.596 54.296,47.596 55.7,49 R509.2@56.85,49 ; R505.2@70.25,49.8 v2(71.6,49.8)
  Bottom Layer w0.3: v2(26.3,51.5) 27.1,50.7 43,50.7 ; v2(43,51.5) 43,50.7 ; v2(71.6,49.8) 70.7,50.7 43,50.7
10V_Q9: D502.1 DZ507.2 R503.2 R507.2 R510.2 | length 55.5
  Top Layer w0.3: v2(26.3,49) D502.1@27.7,49 ; DZ507.2@45.5,49.59 v2(45.5,48.4) 54.1,48.4 55.3,49.6 55.3,50.5 55.8,51 R510.2@56.85,51 ; v2(50.2,49.8) R503.2@51.55,49.8 ; v2(61.8,49.8) R507.2@63.15,49.8
  Bottom Layer w0.3: v2(26.3,49) 27.1,49.8 45.5,49.8 ; v2(45.5,48.4) 45.5,49.8 ; v2(61.8,49.8) v2(50.2,49.8) 45.5,49.8
+5V: C105.1 C106.1 C309.1 C310.1 D107.1 J619.1 J620.1 L301.2 R303.1 U105.8 | length 247.8
  Top Layer w0.4: v2(289,56.3) 295.5,56.3 ; U105.8@293.85,54.405 295.5,54.405 ; C105.1@296.545,54.405 295.5,54.405 ; C106.1@296.55,56.3 295.5,56.3 ; 295.5,54.405 295.5,56.3
  Top Layer w0.5: v2(261,71) D107.1@262.7,71 ; C105.1@296.545,54.405 C105.1@296.55,54.4
  Bottom Layer w0.4: v2(261,71) 261,54.3 263.9,51.4 282.6,51.4 287.5,56.3 v2(289,56.3)
  Bottom Layer w0.5: L301.2@130.9,60.2 130.9,69.5 134.2,72.8 238.4,72.8 241.7,69.5 247.5,69.5 249,71 v2(261,71)
  Bottom Layer w1.25: J619.1@134.8,30.6 137.3,33.1 145.8,33.1 J620.1@148.3,30.6
  Bottom Layer w2.5: v1(116.5,43.8) v1(118,43.8) v1(119.5,43.8) 121.8,43.8 124.1,41.5 124.1,34.8 125.4,33.5 129.2,33.5 130.3,32.4 133,32.4 J619.1@134.8,30.6
+5V3A: C313.1 C314.1 CON603.1 L303.2 R309.1 | length 144.2
  Top Layer w1.9: v1@121.9,29.9 v1@123.1,29.9 ; v1(152.1,30.1) v1(152.1,31.6)
  Top Layer w2: v1@123.4,30 123.4,30.25 123.15,30.5 123.4,30.75 123.4,31 125.5,33.1 150.6,33.1 v1(152.1,31.6)
  Bottom Layer w1.5: v1@121.7,29.6 v1@123.4,29.6
  Bottom Layer w1.8: v1@152.1,30.2 v1(152.1,31.6)
  Bottom Layer w1.9: CON603.1@83.981,33 87.581,29.4 v1@121.7,29.4 ; v1(200.7,59.4) v1(200.7,61)
  Bottom Layer w2: v1(152.1,31.6) 167,46.5 198.1,46.5 200.7,49.1 v1(200.7,59.4)
  other v1: 121.7,29.7 123.4,29.7
+9V3A: C315.1 C316.1 CON604.1 L304.2 R311.1 | length 96.4
  Top Layer w1.9: CON604.1@93.481,33 96.481,30 118.5,30 124.7,36.2 v1(127.4,36.2) v1(127.4,37.6)
  Bottom Layer w1.9: v1(127.4,36.2) v1@127.4,37.3 ; v1(163.6,61.4) v1(163.6,63)
  Bottom Layer w2: v1@127.4,37.3 128.4,38.3 154.8,38.3 163.6,47.1 v1(163.6,61.4)
+12V: C201.1 C202.1 C311.1 C312.1 C401.1 C402.1 C403.1 C404.1 D503.2 D504.2 D505.2 J601.1 J602.1 J603.1 J604.1 J605.1 J606.1 J607.1 J608.1 J609.1 J610.1 J611.1 J612.1 J613.1 J614.1 J615.1 J616.1 K501.4 K502.4 K503.4 L302.2 R217.1 R218.1 R219.1 R220.1 R221.1 R222.1 R223.1 R224.1 R225.1 R226.1 R227.1 R228.1 R229.1 R230.1 R231.1 R232.1 R238.2 R239.2 R240.2 R241.2 R307.1 U201.24 U401.8 U403.8 | length 723.1
  Top Layer w0.3: J601.1@86.8,88.1 86.8,77.5 87.3,77 R224.1@88.15,77 ; J602.1@100.1,88.1 100.1,77.5 100.6,77 R223.1@101.45,77 ; J603.1@113.4,88.1 113.4,77.5 113.9,77 R222.1@114.75,77 ; J604.1@126.7,88.1 126.7,77.5 127.2,77 R221.1@128.05,77 ; J605.1@140,88.1 140,77.5 140.5,77 R220.1@141.35,77 ; J606.1@153.3,88.1 153.3,77.5 153.8,77 R219.1@154.65,77 ; J607.1@166.6,88.1 166.6,77.5 167.1,77 R218.1@167.95,77 ; J608.1@179.9,88.1 179.9,77.5 180.4,77 R217.1@181.25,77 ; J609.1@193.2,88.1 193.2,77.5 193.7,77 R232.1@194.55,77 ; J610.1@206.5,88.1 206.5,77.5 207,77 R231.1@207.85,77 ; J611.1@219.8,88.1 219.8,77.5 220.3,77 R230.1@221.15,77 ; J612.1@233.1,88.1 233.1,77.5 233.6,77 R229.1@234.45,77 ; R240.2@233.15,53.5 232.3,53.5 231.9,53.9 231.9,55.5 ; R241.2@233.15,55.5 231.9,55.5 ; R239.2@233.15,57.5 231.9,57.5 ; R238.2@233.15,59.5 v2(231.9,59.5) 231.9,57.5 ; v2(244.7,61) v2(244.7,71.3) 244.715,71.285 U201.24@247.5,71.285 ; v2(246.4,77) R228.1@247.75,77 ; C201.1@256.1,71.35 256.1,72.2 256.5,72.6 258,72.6 C202.1@258,71.35 ; J614.1@259.7,88.1 259.7,77.5 260.2,77 R227.1@261.05,77 ; J615.1@273,88.1 273,77.5 273.5,77 R226.1@274.35,77 ; J616.1@286.3,88.1 286.3,77.5 286.8,77 R225.1@287.65,77 ; 231.9,55.5 231.9,57.5
  Top Layer w0.4: v2(246.4,77) J613.1@246.4,88.1
  Top Layer w0.5: v1(28.5,55.8) 28.5,54.2 29.5,53.2 29.5,47.7 30.2,47 31.4,47 ; K501.4@29.5,62.3 29.5,58.7 28.5,57.7 28.5,56.1 28.6,56 D503.2@30.714,56 ; C402.1@32.65,45.2 31.4,45.2 ; C401.1@32.65,47 31.4,47 ; U401.8@37.15,41.595 35.705,41.595 35.7,41.6 35.616,41.516 32.984,41.516 31.4,43.1 31.4,45.2 ; K502.4@46.5,62.3 46.5,58.7 45.5,57.7 v1(45.5,56) D504.2@47.714,56 ; K503.4@63.5,62.3 63.5,58.7 62.5,57.7 v1(62.5,56) D505.2@64.714,56 ; J616.1@286.3,88.1 288.9,88.1 v2(301.5,75.5) ; v2(291.005,45.405) U403.8@293.35,45.405 ; C403.1@300,45.65 v2(300,44.5) 301.7,44.5 302,44.8 C404.1@302,45.65 ; 31.4,45.2 31.4,47
  Bottom Layer w0.3: v2(231.9,59.5) 233.4,61 v2(244.7,61) ; v2(244.7,71.3) 246.015,72.615 ; v2(246.4,77) 246.015,76.615 246.015,72.615 ; v2(257.985,72.615) 246.015,72.615
  Bottom Layer w0.5: v2(291.005,45.405) 291.91,44.5 v2(300,44.5) 300,51.4 301.5,52.9 v2(301.5,75.5)
  Bottom Layer w1: v1(28.5,55.8) 43.8,55.8 44,56 v1(45.5,56) ; J602.1@100.1,88.1 100.1,91.2 ; J603.1@113.4,88.1 113.4,91.2 ; J604.1@126.7,88.1 126.7,91.2 ; J605.1@140,88.1 140,91.2 ; J606.1@153.3,88.1 153.3,91.2 ; J607.1@166.6,88.1 166.6,91.2 ; J608.1@179.9,88.1 179.9,91.2 ; J609.1@193.2,88.1 193.2,91.2 ; J610.1@206.5,88.1 206.5,91.2 ; J611.1@219.8,88.1 219.8,91.2 ; J612.1@233.1,88.1 233.1,91.2 ; J613.1@246.4,88.1 246.4,91.2 ; J614.1@259.7,88.1 259.7,91.2 ; J615.1@273,88.1 273,91.2 283.2,91.2 J616.1@286.3,88.1
  Bottom Layer w1.1: 259.7,91.2 273,91.2
  Bottom Layer w1.2: 246.4,91.2 259.7,91.2
  Bottom Layer w1.3: 233.1,91.2 246.4,91.2
  Bottom Layer w1.4: 219.8,91.2 233.1,91.2
  Bottom Layer w1.5: v1(45.5,56) 53.9,56 55.3,54.6 61.1,54.6 v1(62.5,56) ; 206.5,91.2 219.8,91.2
  Bottom Layer w1.6: 193.2,91.2 206.5,91.2
  Bottom Layer w1.7: 179.9,91.2 193.2,91.2
  Bottom Layer w1.8: 166.6,91.2 179.9,91.2
  Bottom Layer w1.9: 153.3,91.2 166.6,91.2
  Bottom Layer w2: v1(62.5,56) 86.9,56 89.8,58.9 ; 89.65,65.25 89.8,65.1 89.8,58.9 ; L302.2@92.9,62 89.8,58.9 ; 140,91.2 153.3,91.2
  Bottom Layer w2.1: 126.7,91.2 140,91.2
  Bottom Layer w2.2: 113.4,91.2 126.7,91.2
  Bottom Layer w2.3: 100.1,91.2 113.4,91.2
  Bottom Layer w2.4: 84.5,85.8 89.9,91.2 100.1,91.2
  Bottom Layer w2.5: 84.5,85.8 84.5,70.4 89.65,65.25 ; 89.8,65.1 L302.2@92.9,62
  other v1: 90.9,61.8 90.9,63.5
+VUC: C101.1 C104.1 D107.2 L101.2 L103.2 P102.2 | length 45.2
  Top Layer w0.4: C104.1@266.35,68.5 267.4,68.5 267.7,68.8 v2(267.7,71) ; D107.2@266.41,71 v2(267.7,71) ; L103.2@268.8,71 v2(267.7,71) ; v2(292,60.1) C101.1@295.85,60.1
  Top Layer w0.5: v2(292,60.1) 292,61.5 292.5,62 L101.2@293.45,62
  Bottom Layer w0.4: v2(267.7,71) 268.8,72.1 281.5,72.1 286.74,66.86 P102.2@286.74,62.6
  Bottom Layer w0.5: P102.2@286.74,62.6 289.5,62.6 v2(292,60.1)
A2: R101.1 U104.3 U105.3 | length 33.8
  Top Layer w0.254: U104.3@286.45,70.135 289.635,70.135 v2(290,70.5) R101.1@292.65,70.5
  Top Layer w0.3: v2(287.15,51.88) 287.165,51.865 U105.3@289.15,51.865
  Bottom Layer w0.3: v2(287.15,51.88) 290.38,51.88 291,52.5 291,56.731 293.2,58.931 293.2,60.3 288.7,64.8 288.7,69.2 v2(290,70.5)
A3: R102.1 U104.2 U105.5 | length 32.2
  Top Layer w0.254: U104.2@286.45,68.865 289.635,68.865 v2(290,68.5) R102.1@292.65,68.5
  Top Layer w0.3: U105.5@293.85,50.595 295.835,50.595 v2(295.85,50.58)
  Bottom Layer w0.3: v2(290,68.5) 289.5,68 289.5,65.131 294,60.631 294,58.6 291.8,56.4 291.8,52.5 293.72,50.58 v2(295.85,50.58)
B0: CON101.1 DZ101.2 R103.2 | length 16
  Top Layer w0.254: R103.2@269.3,55.35 269.3,56.7 ; DZ101.2@271.5,55.31 271.5,56.1 271,56.6 269.4,56.6 269.3,56.7 ; CON101.1@272.384,66 271,66 269.3,64.3 269.3,56.7
B1: CON102.1 DZ102.2 R104.2 | length 15.3
  Top Layer w0.254: CON102.1@272.384,63 271,63 270,62 270,58.4 270.9,57.5 272.8,57.5 273.7,56.6 ; R104.2@273.7,55.35 273.7,56.6 ; DZ102.2@275.9,55.31 275.9,56.2 275.5,56.6 273.7,56.6
B2: CON103.1 D105.2 D106.2 R107.1 | length 17.2
  Top Layer w0.254: CON103.1@272.384,60 271,60 270.7,59.7 270.7,58.7 271.2,58.2 276.7,58.2 278.4,56.5 ; D105.2@278.4,55.31 278.4,56.5 ; R107.1@279.5,57.65 279.5,56.55 279.45,56.5 ; D106.2@280.9,55.31 280.9,56.1 280.5,56.5 279.45,56.5 ; 278.4,56.5 279.45,56.5
C_SW1: K501.1 P603.2 | length 29
  Bottom Layer w3: K501.1@35.5,60.3 35.5,77.9 43.1,85.5 P603.2@43.1,86.2
C_SW2: K502.1 P604.2 | length 28.3
  Bottom Layer w3: K502.1@52.5,60.3 52.5,77.1 58.3,82.9 P604.2@58.3,86.2
C_SW3: K503.1 P605.2 | length 27.6
  Bottom Layer w3: K503.1@69.5,60.3 69.5,75.9 73.5,79.9 P605.2@73.5,86.2
CLK: CON103.2 P102.3 U104.7 | length 24.7
  Top Layer w0.254: CON103.2@274.416,60 275.5,60 276.9,61.4 276.9,68.3 277.465,68.865 U104.7@279.55,68.865 281.535,68.865 282.1,68.3 282.1,66.4 283,65.5 283,61.26 P102.3@284.2,60.06
COMDRIVER0: CON601.3 U402.3 | length 13.3
  Bottom Layer w0.5: U402.3@34.31,40.23 39.57,40.23 41.519,38.281 CON601.3@41.519,33
COMDRIVER1: CON602.3 U404.3 | length 16.9
  Bottom Layer w0.5: CON602.3@285.019,33 285.019,35.819 290.9,41.7 291.6,41.7 292.67,42.77 U404.3@296.19,42.77
DIRDRIVER0: CON601.2 U402.4 | length 16.9
  Bottom Layer w0.5: U402.4@34.31,42.77 38.53,42.77 45.481,35.819 CON601.2@45.481,33
DIRDRIVER1: CON602.2 U404.4 | length 13.3
  Bottom Layer w0.5: CON602.2@288.981,33 288.981,38.281 290.93,40.23 U404.4@296.19,40.23